# Altium PCB Board.PcbDoc
Units mil, origin at the board's own origin, x right, y up, seen from the top; angles counter-clockwise.
Board outline 1038 x 840 mil, 2 copper layers (Top Layer, Bottom Layer); 8 components, 6 nets, 32 pads, 7 vias.
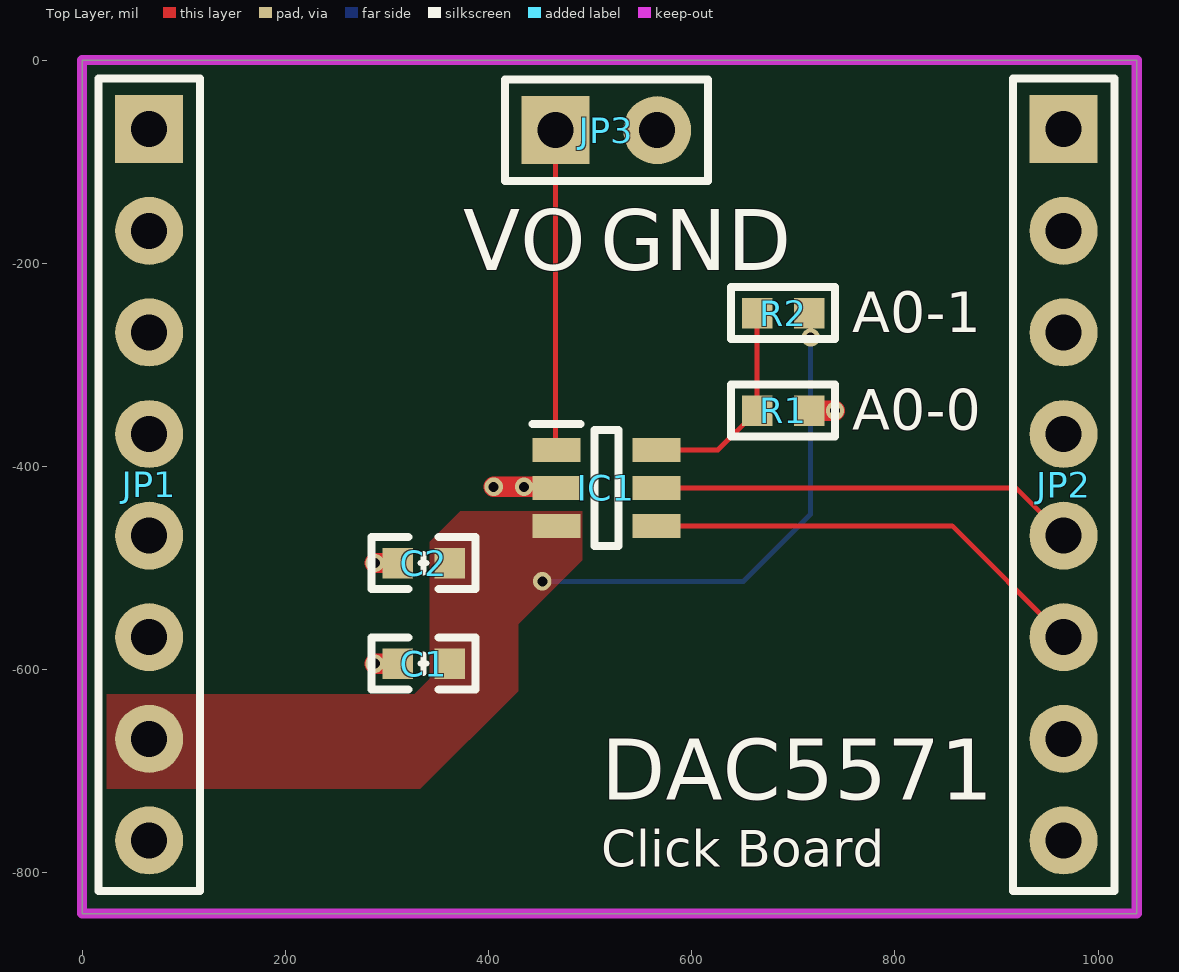
[diagram p0: Top Layer view]
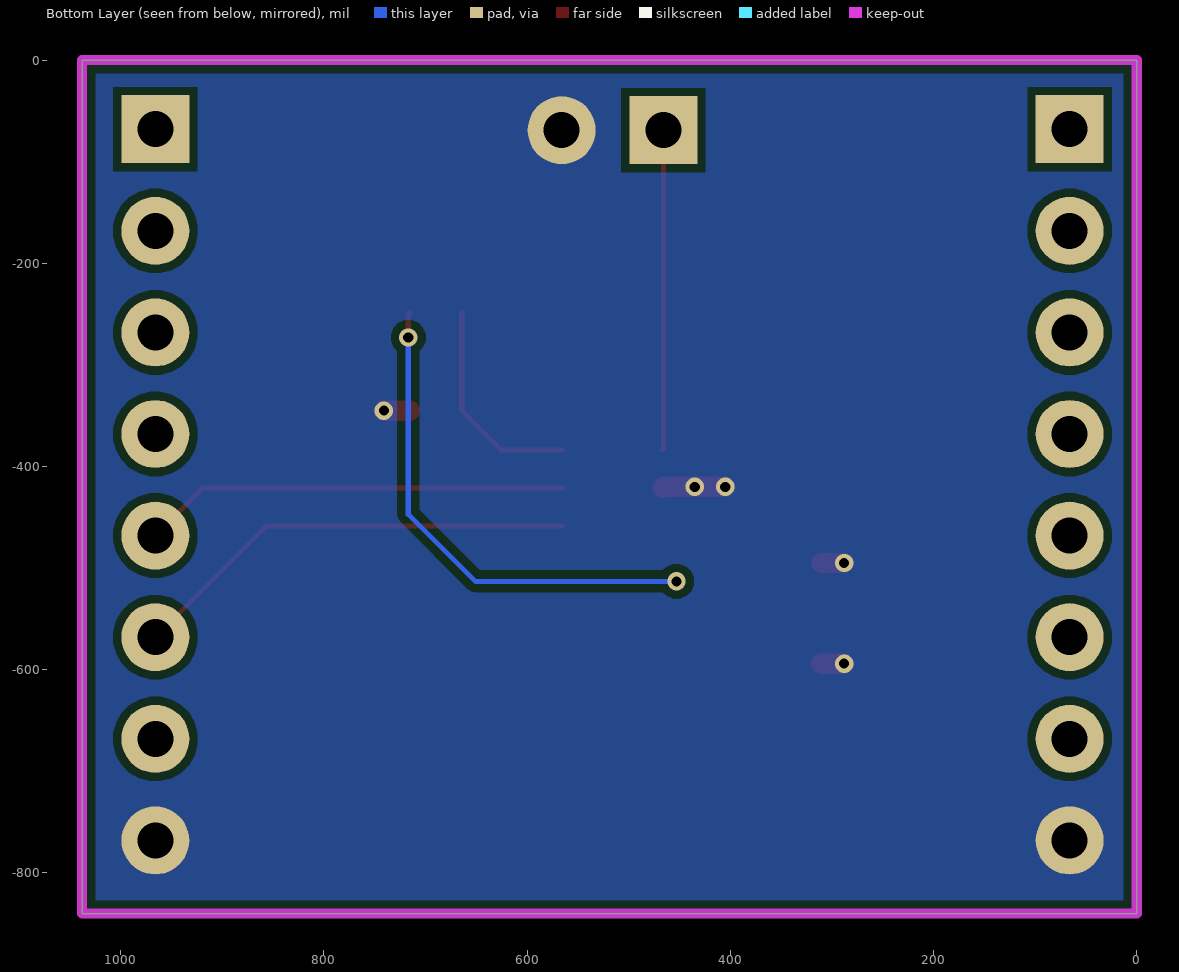
[diagram p1: Bottom Layer view, seen from below]

## Layer stack, top to bottom
Top Solder: solder mask 0.4, Solder Resist, Dk 3.5
Top Layer: signal copper 1.4
Dielectric 1: dielectric 12.6, FR-4, Dk 4.8
Bottom Layer: signal copper 1.4
Bottom Solder: solder mask 0.4, Solder Resist, Dk 3.5

## Board outline
0,-840 0,0 1038,0 1038,-840

## Design rules (kind name [scope] priority, off if disabled: settings)
Clearance [All] p1: gap=8 ignorepadtopadclearanceinfootprint=TRUE
DiffPairsRouting [All] p1: maxlimit=10 minlimit=8 mostfreqgap=8 toplayer_minwidth=5 toplayer_maxwidth=15 toplayer_prefwidth=5 bottomlayer_minwidth=5 bottomlayer_maxwidth=15 bottomlayer_prefwidth=5 maxuncoupledlength=500
PlaneClearance [All] p1: clearance=8
PlaneConnect [All] p1: planeconnectstyle=Direct reliefexpansion=20 reliefentries=4 reliefconductorwidth=10 reliefairgap=10
PolygonConnect [All] p1: connectstyle=Direct reliefconductorwidth=10 reliefentries=4 polygonreliefangle="90 Angle" airgapwidth=10
RoomDefinition Main [InComponentClass('Main')] p1: confinementstyle=ConfineIn formatcopy=TRUE lockcomponents=FALSE outline 2338,-2362 8303,-2362 8303,-1847 2338,-1847
RoutingVias [All] p1: holewidth=10 width=18 viastyle="Through Hole" minholewidth=10 minwidth=18 maxholewidth=10 maxwidth=18
SolderMaskExpansion [IsVia] p1: expansion=4 istentingtop=TRUE
Width [All] p1: maxlimit=20 minlimit=5 preferedwidth=5
27 further rules are at their usual default settings.

## Components (designator, comment, footprint, x,y, rotation, side; value= is the part's Value field where it differs from the comment)
C1 "10uF" "C 0603_L" 336,-594 r0 top
C2 "0.1uF" "C 0603_L" 336,-495 r0 top
IC1 "DAC5571IDBVR" SOT95P280X145-6N 516,-420.95 r0 top
JP1 "HDR-1X8" HDR2.54-LI-8P 66,-418 r270 top locked
JP2 "HDR-1X8" HDR2.54-LI-8P 966,-418 r270 top
JP3 "HDR-1X2" HDR2.54-LI-2P 516,-69 r0 top
R1 "0" "R 0603_L" 690,-345 r0 top
R2 "NC" "R 0603_L" 690,-249 r0 top

## Footprints (in the part's own frame and the unit in brackets; to place one, negate y for a bottom-side part, rotate by r counter-clockwise, add the part's x,y. Pads: shape width x height; smd on the part's side, far side on the other; paste and mask are expansions set on the pad)
"C 0603_L" [mil] "无极性贴片电容                                       淘宝ID:黄晶宝石"
  rect 30x30 smd: 1(-25.59,0) 2(25.59,0)
  silkscreen extent -51,-26 51,26, body extent -31,-16 31,16, height 32
HDR2.54-LI-2P [mm] "封装库来自淘宝卖家 ID：黄晶宝石"
  rect 1.7x1.7 hole 0.9: 1(-1.27,0)
  round 1.7 hole 0.9: 2(1.27,0)
  silkscreen extent -2.54,-1.27 2.54,1.27, body extent -2.54,-1.27 2.54,1.27, height 8.5
HDR2.54-LI-8P [mm] "排针，8脚  淘宝ID:黄晶宝石   店铺网址:https://shop463601444.taobao.com"
  rect 1.7x1.7 hole 0.9: 1(-8.89,0)
  round 1.7 hole 0.9: 2(-6.35,0) 3(-3.81,0) 4(-1.27,0) 5(1.27,0) 6(3.81,0) 7(6.35,0) 8(8.89,0)
  silkscreen extent -10.16,-1.27 10.16,1.27, body extent -10.16,-1.27 10.16,1.27, height 8.5
"R 0603_L" [mil] "1/10W贴片电阻                 淘宝ID:黄晶宝石"
  rect 30x30 smd: 1(-25.59,0) 2(25.59,0)
  silkscreen extent -51,-26 51,26, body extent -31,-16 32,16, height 16
SOT95P280X145-6N [mm]
  rect 1.2x0.6 smd: 1(-1.25,0.95) 2(-1.25,0) 3(-1.25,-0.95) 4(1.25,-0.95) 5(1.25,0) 6(1.25,0.95)
  silkscreen extent -1.85,-1.45 0.3,1.6, body extent -1.4,-1.45 1.4,1.45, height 1.2

## Part data
C1 C2: library part C, "贴片电容", BOM名称=无极性贴片电容, 唯一出售店铺网址=https://shop463601444.taobao.com, 淘宝ID="封装库来自淘宝 ID：黄晶宝石", 联系售后，技术支持=https://shop463601444.taobao.com
IC1: "Integrated Circuit", Manufacturer_Name="Texas Instruments", Mouser Part Number=595-DAC5571IDBVR, Arrow Part Number=DAC5571IDBVR, Arrow Price/Stock=https://www.arrow.com/en/products/dac5571idbvr/texas-instruments?region=nac, Datasheet Link=http://www.ti.com/lit/gpn/DAC5571, Height=1.45mm, Manufacturer_Part_Number=DAC5571IDBVR, Mouser Price/Stock=https://www.mouser.co.uk/ProductDetail/Texas-Instruments/DAC5571IDBVR?qs=vul0MlC%2Fa1d8ma5XBaLG%252Bg%3D%3D
JP1 JP2: library part "Header 8", "8P接插件", BOM名称=8P接插件, 学习资源=https://shop463601444.taobao.com, 版权归属="封装库来自淘宝 ID：黄晶宝石"
JP3: library part "Header 2", "2P接插件", BOM名称=2P接插件, 版权归属="封装库来自淘宝 ID：黄晶宝石", 联系售后=https://shop463601444.taobao.com
R1 R2: library part R, "贴片电阻", BOM名称=贴片电阻, 封装库来自淘宝卖家 ID：黄晶宝石=其他店铺购入均为盗版，不享受售后技术支持服务，请立即申请退款, 版权归属="来自淘宝 ID：黄晶宝石", 联系售后=https://shop463601444.taobao.com

## Via types
v1: diameter 18, hole 10, Top Layer to Bottom Layer, tented both sides, 7 vias

## Nets (pads, with @x,y where several pads share a name; then routed paths per layer and width w, separated by ;. In a path a pad name is that pad's centre, name@x,y a point inside that pad or via, vN(x,y) a via of type N, cw(c..) or ccw(c..) an arc to the next point about the centre after c; other vN are vias at no path point)
A0: IC1.6 R1.1 R2.1 | length 211.2
  Top Layer w5: IC1.6 625.86,-383.55 R1.1 R2.1
GND: C1.1 C2.1 IC1.2 JP1.8 JP2.8 JP3.2 R1.2 | length 132.4
  Top Layer w20: v1(288,-594) C1.1 ; v1(288,-495) C2.1 ; v1(405,-420) v1(435,-420) 465.83,-420 IC1.2 ; R1.2 v1(741,-345)
SCL: IC1.5 JP2.5 | length 420.3
  Top Layer w5: IC1.5 918.95,-420.95 JP2.5
SDA: IC1.4 JP2.6 | length 446.2
  Top Layer w5: IC1.4 856.35,-458.35 JP2.6
VDD: C1.2 C2.2 IC1.3 JP1.7 R2.2 | length 489.9
  Top Layer w5: R2.2 717,-250.42 v1(717,-273)
  Bottom Layer w5: v1(453,-513) 651,-513 717,-447 v1(717,-273)
VOUT: IC1.1 JP3.1 | length 314.9
  Top Layer w5: JP3.1 466,-382.76 IC1.1
pads on no net: JP1.1 JP1.2 JP1.3 JP1.4 JP1.5 JP1.6 JP2.1 JP2.2 JP2.3 JP2.4 JP2.7

## Polygon pours and split planes (outlines as drawn)
VDD on Top Layer "VDD_L01_P000" (solid, pour order 0): 24,-624 327,-624 342,-609 342,-474 372,-444 492,-444 492,-492 429,-555 429,-621 333,-717 24,-717
GND on Bottom Layer "GND_L02_P001" (solid, remove dead copper, pour order 1): -72,51 -69,54 1086,54 1086,-924 -81,-924

## Keep-outs
Keep-Out Layer:
  the board outline again, w10

## Silkscreen, mask and mechanical layers (free items; w line width, h text height)
Top Overlay:
  text "VO" at 375,-207 h60
  text "GND" at 510,-207 h60
  text "A0-1" at 758,-268 h40
  text "A0-0" at 758,-364 h40
  text "DAC5571" at 511,-728 h60
  text "Click Board" at 511,-794 h36
Mechanical 1:
  the board outline again, w10